# Altium PCB Power_Module.PcbDoc
Units mil, origin at the board's own origin, x right, y up, seen from the top; angles counter-clockwise.
Board outline 2558.55 x 1390.89 mil, 2 copper layers (Top Layer, Bottom Layer); 38 components, 10 nets, 91 pads, 28 vias.
Unrouted connection lines stored in the file: 32.
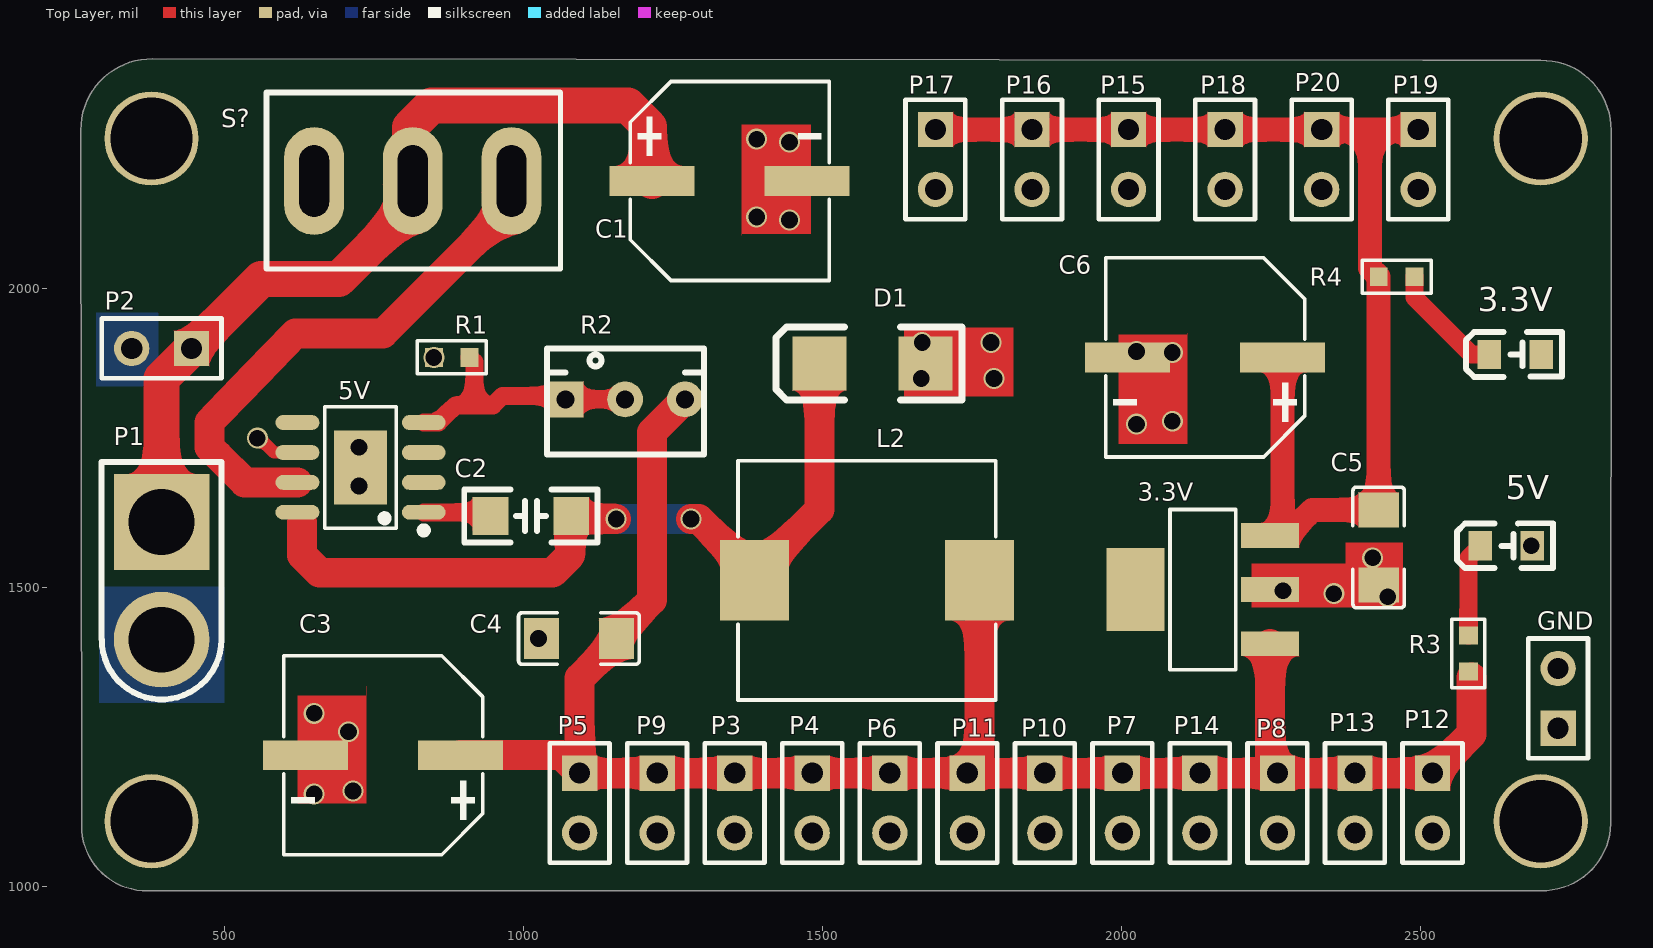
[diagram p0: Top Layer view]
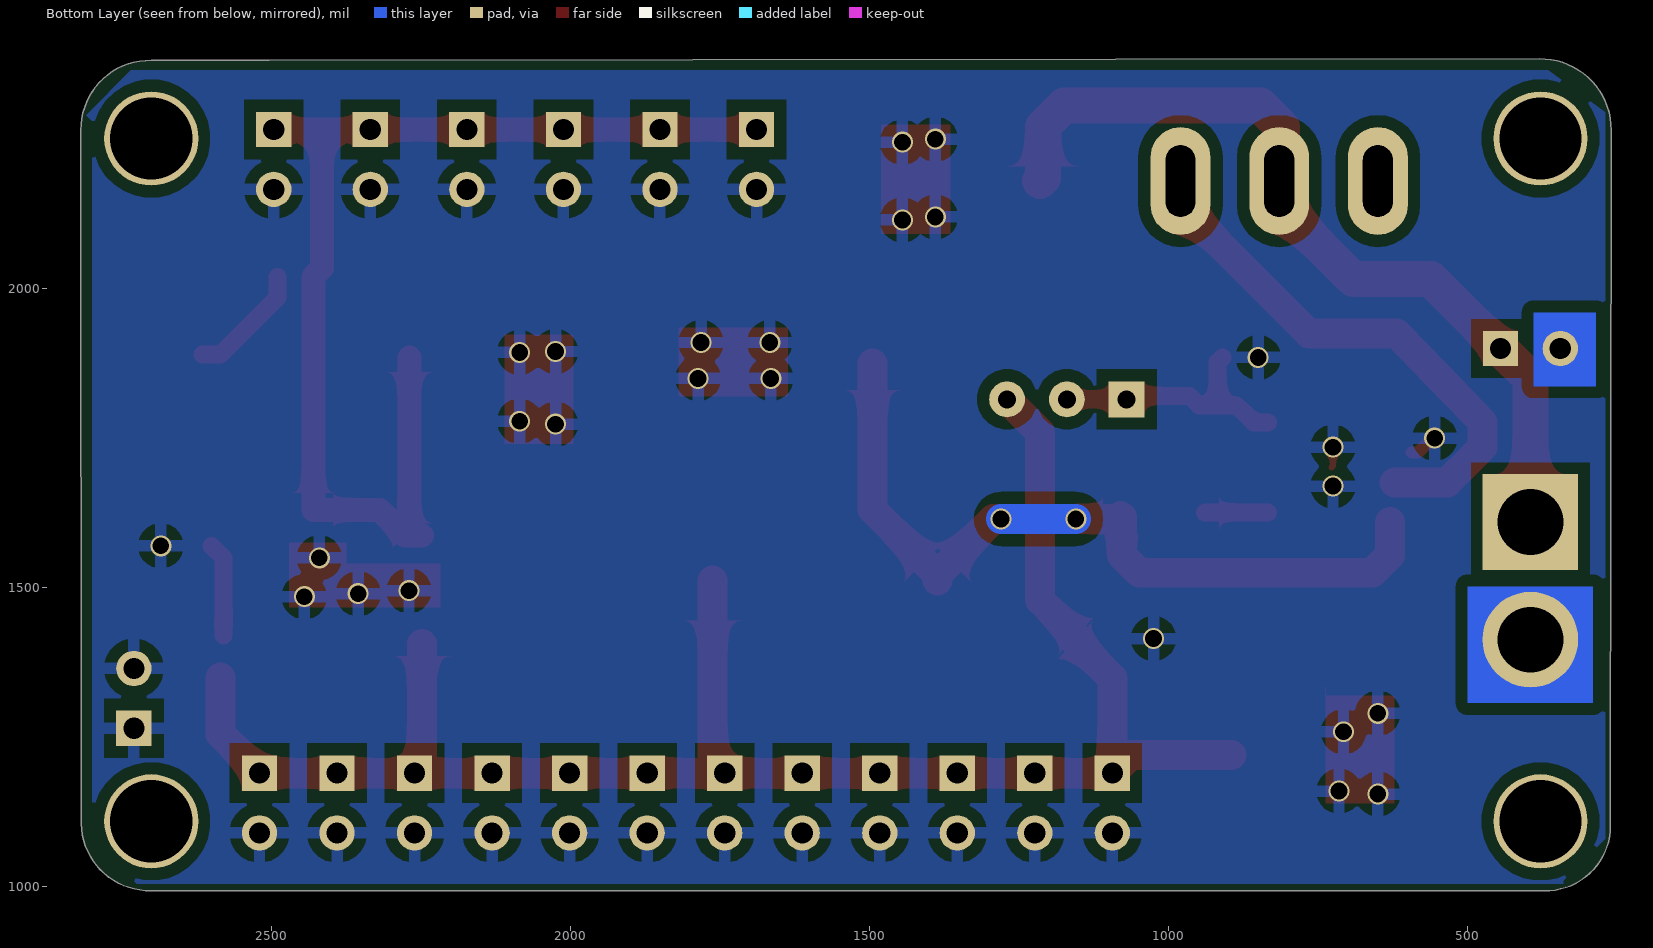
[diagram p1: Bottom Layer view, seen from below]

## Layer stack, top to bottom
Top Solder: solder mask 0.4, Solder Resist, Dk 3.5
Top Layer: signal copper 1.4
Dielectric 1: dielectric 12.6, FR-4, Dk 4.8
Bottom Layer: signal copper 1.4
Bottom Solder: solder mask 0.4, Solder Resist, Dk 3.5

## Board outline
371.69,993.3 cw(c369.8,1101.94) 261.14,1102.99 260.05,2265 cw(c378.11,2266.14) 380.16,2384.19 2504.01,2381.74 2700.86,2381.74 cw(c2702.87,2266.02) 2818.6,2264.9 2817.98,1105.28 cw(c2703.7,1107.71) 2701.27,993.43 2504.42,993.43

## Design rules (kind name [scope] priority, off if disabled: settings)
Clearance [All] p1: gap=6 ignorepadtopadclearanceinfootprint=TRUE
HoleSize [All] p1: absolutevalues=TRUE maxlimit=200 minlimit=1 maxpercent=80.000 minpercent=20.000
HoleToHoleClearance [All] p1: gap=6 allowstackedmicrovias=TRUE
PolygonConnect [All] p1: connectstyle=Relief reliefconductorwidth=20 reliefentries=4 polygonreliefangle="90 Angle" airgapwidth=20
RoutingVias [All] p1: holewidth=28 width=50 viastyle="Through Hole" minholewidth=11.81 minwidth=23.62 maxholewidth=11.81 maxwidth=23.62
SilkToSolderMaskClearance [IsPad] p1: minsilkscreentomaskgap=0 clearancetoexposedcopper=TRUE
SolderMaskExpansion [All] p1: expansion=4 istentingtop=FALSE
UnRoutedNet [All] p1 off:
Width power [InNetClass('POWER')] p1: maxlimit=60 minlimit=12 preferedwidth=20
Width [All] p2: maxlimit=100 minlimit=1 preferedwidth=10
26 further rules are at their usual default settings.

## Components (designator, comment, footprint, x,y, rotation, side; value= is the part's Value field where it differs from the comment)
3.3V "LED0" "LED 0805紫光二极管" 2655.63,1887.6 r0 top (schematic designator LED2)
3.3V "LM39100S-3.3" LM39100 2140,1485 r0 top (schematic designator U2)
5V "LED0" "LED 0805紫光二极管" 2640.63,1567.6 r0 top (schematic designator LED1)
5V "TPS5430DDA" TPS5430DDA. 720,1675 r90 top (schematic designator U1)
C1 "Cap Pol2" 电解电容470uf 1358.94,2180.61 r0 top value=220uF
C2 "102" 电容102 1017.5,1625 r0 top value=1000pF
C3 "Cap Pol2" 电解电容470uf 751.06,1219.39 r180 top value=470uF
C4 "104" 电容104 1092.7,1415 r0 top value=1000pF
C5 "104" 电容104 2430,1567.3 r90 top value=1000pF
C6 "Cap Pol2" 电解电容470uf 2125.51,1884.39 r180 top value=220uF
D1 "SS56" SMB 1583.58,1875 r180 top
GND "GND" HDR1X2 2730,1265 r90 top (schematic designator P21)
L2 "Inductor" 功率电感7*8 1570,1495 r180 top value=22mH
P1 "VCC8V" XT30. 395,1610 r270 top
P2 "VCC8V" HDR1X2 445,1900 r180 top
P3 "5V" HDR1X2 1353.22,1190 r270 top
P4 "5V" HDR1X2 1482.86,1190 r270 top
P5 "5V" HDR1X2 1093.94,1190 r270 top
P6 "5V" HDR1X2 1612.51,1190 r270 top
P7 "5V" HDR1X2 2001.43,1190 r270 top
P8 "5V" HDR1X2 2260.72,1190 r270 top
P9 "5V" HDR1X2 1223.58,1190 r270 top
P10 "5V" HDR1X2 1871.79,1190 r270 top
P11 "5V" HDR1X2 1742.15,1190 r270 top
P12 "5V" HDR1X2 2520,1190 r270 top
P13 "5V" HDR1X2 2390.36,1190 r270 top
P14 "5V" HDR1X2 2131.07,1190 r270 top
P15 "3.3V" HDR1X2 2011.83,2266.06 r270 top
P16 "3.3V" HDR1X2 1850.39,2266.06 r270 top
P17 "3.3V" HDR1X2 1688.94,2266.06 r270 top
P18 "3.3V" HDR1X2 2173.28,2266.06 r270 top
P19 "3.3V" HDR1X2 2496.18,2266.06 r270 top
P20 "3.3V" HDR1X2 2334.73,2266.06 r270 top
R1 "2K" 0603R 880.08,1885 r180 top
R2 "10kΩ" 可调电阻10k 1170,1815 r90 top
R3 "2K" 0603R 2580,1390.08 r270 top
R4 "2K" 0603R 2460.08,2020 r180 top
S? "SW-SPDT" SW-SPDT 980,2180 r180 top

## Footprints (in the part's own frame and the unit in brackets; to place one, negate y for a bottom-side part, rotate by r counter-clockwise, add the part's x,y. Pads: shape width x height; smd on the part's side, far side on the other; paste and mask are expansions set on the pad)
0603R [mm]
  rect 0.76x0.8 smd: 1(-0.76,0) 2(0.76,0)
  silkscreen extent -1.46,-0.7 1.46,0.7
HDR1X2 [mm] "Connector; Header; 2 Position"
  rect 1.5x1.5 hole 0.9: 1(0,0)
  round 1.5 hole 0.9: 2(2.54,0)
  silkscreen extent -1.27,-1.27 3.81,1.27
"LED 0805紫光二极管" [mm]
  rect 1x1.25 smd: 1(-1.032,0.061) 2(1.168,0.061)
  silkscreen extent -2.03,-0.89 2.05,1.02
LM39100 [mm]
  rect 2.465x1.05 smd: 1(2.756,-1.998) 2(2.756,0.302) 3(2.756,2.602)
  rect 2.465x3.54 smd: 4(-2.959,0.302)
  silkscreen extent -1.5,-3.1 1.3,3.7
SMB [mm]
  rect 2.3x2.3 smd: 1(-2.25,0) 2(2.25,0)
  silkscreen extent -3.8,-1.55 4.1,1.55
SW-SPDT [mil]
  oval 100x180 hole 120 slot 50 at 0 deg: 1(0,0) 2(165,0) 3(330,0)
  silkscreen extent -82,-148 410,147
TPS5430DDA. [mm]
  oval 0.63x1.865 smd: 1(-1.242,-2.878) 2(0.028,-2.878) 3(1.298,-2.878) 4(2.568,-2.878) 5(2.568,2.487) 6(1.298,2.487) 7(0.028,2.487) 8(-1.242,2.487)
  rect 3.15x2.26 smd: 9(0.663,-0.195)
  silkscreen extent -2.16,-3.03 3.24,1.33
XT30. [mil]
  rect 160x160 hole 110: 1(0,0)
  round 160 hole 110: 2(196.85,0)
  silkscreen extent -100,-100 297,100
功率电感7*8 [mm]
  rect 2.924x3.42 smd: 1(4.668,-0.436) 2(-4.888,-0.436)
  silkscreen extent -5.59,-5.51 5.37,4.64
可调电阻10k [mil]
  rect 60x60 hole 30: 1(0,100)
  round 60 hole 30: 2(0,0) 3(0,-100)
  silkscreen extent -92,-132 85,131
电容102 [mil]
  rect 60x62.99 smd: 1(-72.5,-5) 2(62.5,-5)
  silkscreen extent -116,-49 106,39, body extent -68,-37 58,27, height 48
电容104 [mm]
  rect 1.485x1.728 smd: 1(-1.593,0) 2(1.593,0)
  silkscreen extent -2.56,-1.09 2.56,1.09
电解电容470uf [mm]
  rect 3.61x1.26 smd: 1(-3.656,-0.016) 2(2.934,-0.016)
  silkscreen extent -4.59,-4.24 3.87,4.21

## Part data
3.3V 5V: "Typical INFRARED GaAs LED", LatestRevisionDate=08-Jul-2005, LatestRevisionNote="Mech Layer 1 removed.", PackageDescription="LED; 2 Leads", PackageReference=LED-0, Published=8-Jun-2000, Publisher="Altium Limited"
3.3V: BOM_JLCPCB Part Class="Extended Part", BOM_Manufacturer=HTC, BOM_Manufacturer Part=LM39100S-3.3, BOM_Supplier=LCSC, BOM_Supplier Part=C126055, Contributor=LCSC, spicePre=U, spiceSymbolName=LM39100S-3.3
5V: BOM_JLCPCB Part Class="Extended Part", BOM_Manufacturer=TI(德州仪器), BOM_Manufacturer Part=TPS5430DDA, BOM_Supplier=LCSC, BOM_Supplier Part=C502477, Contributor=lcsc, spicePre=U, spiceSymbolName=TPS5430DDA
C1 C3 C6: "Polarized Capacitor (Axial)", LatestRevisionDate=17-Jul-2002, LatestRevisionNote="Re-released for DXP Platform.", PackageDescription="Polarized Capacitor; 2 Leads", PackageReference=POLAR0.8, Published=8-Jun-2000, Publisher="Altium Limited"
C2 C4 C5: library part "Cap Semi", "Capacitor (Semiconductor SIM Model)", LatestRevisionDate=29-May-2009, LatestRevisionNote="IPC-7351 Footprint Added.", PackageDescription="Chip Capacitor", PackageReference=C1206, Published=8-Jun-2000, Publisher="Altium Limited"
D1: library part Diode, "Default Diode", Code_JEDEC=DO-214-AB, LatestRevisionDate=17-Jul-2002, LatestRevisionNote="Re-released for DXP Platform.", PackageDescription="DO-214-AB/SMC; 2 C-Bend Leads; Body 7.9 x 5.9 mm, inc. leads (LxW)", PackageReference=SMC, PackageVersion=Sep-1996, Published=8-Jun-2000, Publisher="Altium Limited"
GND P1 P2 P3 P4 P5 P6 P7 P8 P9 P10 P11 P12 P13 P14 P15 P16 P17 P18 P19 P20: library part "Header 2", "Header, 2-Pin", LatestRevisionDate=17-Jul-2002, LatestRevisionNote="Re-released for DXP Platform.", Publisher="Altium Limited"
R1 R3 R4: library part Res2, "Resistor", LatestRevisionDate=17-Jul-2002, LatestRevisionNote="Re-released for DXP Platform.", PackageDescription="Axial Device, Thru-Hole; 2 Leads; 0.4 in Pin Spacing", PackageReference=AXIAL-0.4, Published=8-Jun-2000, Publisher="Altium Limited"
R2: BOM_JLCPCB Part Class="Extended Part", BOM_Manufacturer=BOURNS, BOM_Manufacturer Part=3266Y-1-103LF, BOM_Supplier=LCSC, BOM_Supplier Part=C719182, Contributor=LCSC, nameAlias=Resistance, spicePre=R, spiceSymbolName=3266Y-1-103LF
S?: "SPDT Subminiature Toggle Switch, Right Angle Mounting, Vertical Actuation", ComponentLink1Description="Manufacturer Link", ComponentLink1URL=http://www.apem.com, DatasheetVersion=05-Dec-2000, LatestRevisionDate=17-Dec-2003, LatestRevisionNote="Schematic revised, PCB Footprint replaced.", PackageDescription="Switch; 4 Leads", PackageReference=TL36WW15050, Published=24-Mar-1999, Publisher="Altium Limited"
L2: Code_IEC=1005, Code_JEITA=0402, LatestRevisionDate=29-May-2009, LatestRevisionNote="IPC-7351 Footprint Added.", PackageDescription="Chip Inductor", PackageReference=0402-A, Published=8-Jun-2000, Publisher="Altium Limited"

## Free pads (board coordinates)
  round 157.48 hole 137.8 unplated: 14(378.11,1109.41) 14(378.11,2251.14) 14(2700.94,1109.41) 14(2700.94,2251.14)

## Via types
v1: diameter 35, hole 28, Top Layer to Bottom Layer, 28 vias

## Nets (pads, with @x,y where several pads share a name; then routed paths per layer and width w, separated by ;. In a path a pad name is that pad's centre, name@x,y a point inside that pad or via, vN(x,y) a via of type N, cw(c..) or ccw(c..) an arc to the next point about the centre after c; other vN are vias at no path point)
GND: 3.3V.2 5V.2@2686.61,1570 5V.6 5V.9 C1.2 C3.2 C4.1 C5.1 C6.2 D1.1 GND.1 GND.2 P1.2 P2.2 P3.2 P4.2 P5.2 P6.2 P7.2 P8.2 P9.2 P10.2 P11.2 P12.2 P13.2 P14.2 P15.2 P16.2 P17.2 P18.2 P19.2 P20.2 R1.2 | length 246.9
  Top Layer w10: C3.2 647.09,1220 C3.2@666.89,1200.2 ; v1(725,1735) 725,1703.8 5V.9 ; v1(1445,2115) 1445,2160.2 1450,2160.2 C1.2@1469.8,2180 ; v1(2420,1550) 2420,1514.61 C5.1
  Top Layer w20: v1@559.06,1750 582.94,1726.12 5V.6@593.75,1726.12
  other v1: 650,1155 715,1160 707.5,1259.12 650,1290 1025,1415 2445,1485 2355,1490 2270,1495 2685,1570 725,1670 555,1750 2025,1773.38 2085,1778.38 1665,1850 1786.62,1850 850.16,1885 2085,1893.38 2025,1895 1666.62,1910 1781.62,1910 1390,2120 1445,2245 1390,2250
NetC2_1: 5V.1@833.29,1626.12 C2.1 | length 114.2
  Top Layer w10: C2.1@938.88,1626.12 C2.1
  Top Layer w30: 5V.1@833.29,1626.12 C2.1@938.88,1626.12
NetC2_2: 5V.8 C2.2 D1.2 L2.1 | length 1349.4
  Top Layer w50: 630,1610 630,1554.29 659.29,1525 1048.86,1525 1078.15,1554.29 1078.15,1618.15 C2.2 1085,1615 v1(1155,1615) ; v1(1280,1615) 1293.14,1615 L2.1@1386.22,1521.91 ; L2.1 L2.1@1386.22,1521.91 ; D1.2 1495,1630.69 L2.1@1386.22,1521.91
  Bottom Layer w50: v1(1155,1615) v1(1280,1615)
NetLED1_1: 5V.1@2600,1570 R3.1 | length 158.3
  Top Layer w30: R3.1 2580,1550 5V.1@2600,1570
NetLED2_1: 3.3V.1@2615,1890 R4.1 | length 199.4
  Top Layer w30: R4.1 2490,1985 2585,1890 3.3V.1@2615,1890
NetR1_1: 5V.4 R1.1 R2.1 R2.2 | length 440.9
  Top Layer w30: 5V.4 857.6,1776.12 886.48,1805 917.81,1805 ; R1.1 917.81,1877.19 917.81,1805 ; R2.2 R2.1 1064.14,1820.86 965,1820.86 949.14,1805 917.81,1805
NetS?_1: 5V.7 S?.1 | length 909.9
  Top Layer w50: 5V.7 533.88,1676.12 489.18,1720.82 475.1,1734.9 475.1,1776.32 488.62,1790.95 552.89,1857.33 618.42,1925 765,1925 980,2140 S?.1
VCC3.3V: 3.3V.3 C5.2 C6.1 P15.1 P16.1 P17.1 P18.1 P19.1 P20.1 R4.2 | length 1946.4
  Top Layer w40: P17.1 P16.1 P15.1 P18.1 P20.1 2415.46,2266.06 ; 3.3V.3 3.3V.3@2268.78,1587.46 ; C6.1 2269.45,1588.13 3.3V.3@2268.78,1587.46 ; P19.1 2415.46,2266.06 ; 3.3V.3@2268.78,1587.46 2276.38,1587.46 2318.92,1630 C5.2 2430,2019.84 R4.2 2415.46,2034.7 2415.46,2266.06
VCC5V: 3.3V.1@2248.52,1406.36 C3.1 C4.2 L2.2 P3.1 P4.1 P5.1 P6.1 P7.1 P8.1 P9.1 P10.1 P11.1 P12.1 P13.1 P14.1 R2.3 R3.2 | length 3074.2
  Top Layer w50: C3.1 1063.94,1220 P5.1 ; R2.3 1215,1760 1215,1479.39 1159.63,1424.02 1159.63,1419.23 C4.2 1155.39,1410.22 1093.94,1348.76 P5.1 ; L2.2 1762.44,1210.29 P11.1 ; 3.3V.1@2248.52,1406.36 2248.52,1202.19 P8.1 ; R3.2@2585,1350 2585,1255 P12.1 P13.1 P8.1 ; P5.1 P9.1 P3.1 P4.1 P6.1 P11.1 ; P11.1 P10.1 P7.1 P14.1 P8.1
VCC8V: C1.1 P1.1 P2.1 S?.2 | length 1434.5
  Top Layer w60: P1.1 395,1850 P2.1 561.17,2016.17 691.17,2016.17 815,2140 S?.2 810,2185 810,2269.85 846.15,2306 1174.85,2306 1210,2270.85 1210,2185 C1.1
pads on no net: 3.3V.4 5V.2@833.29,1676.12 5V.3 5V.5 S?.3

## Polygon pours and split planes (outlines as drawn)
GND on Bottom Layer "NONET_L-01_P-001" (solid, pour order 0): 365,2365 2735,2365 2810,2290 2800,2280 2800,1080 2725,1005 340,1005 340,1010 270,1080 270,2295

## Other copper
Top Layer:
  region net GND: 2375,1575 2470,1575 2470,1570 2470,1565 2470,1540 2375,1540
  region net GND: 737.5,1335 737.5,1140 622.5,1140 622.5,1319.12 737.5,1319.12
  region net GND: 2110,1925.88 2110,1740.88 1995,1740.88 1995,1923.38 2110,1923.38
  region net GND: 2375,1467.5 2217.5,1467.5 2217.5,1540 2470,1540 2470,1467.5
  region net GND: 1634.12,1935 1819.12,1935 1819.12,1820 1636.62,1820 1636.62,1935
  region net GND: 1365,2089.12 1365,2274.12 1480,2274.12 1480,2091.62 1365,2091.62
Bottom Layer:
  rectangle net GND: 285,1836.85 390,1960
  rectangle net GND: 290,1306.85 500,1501.85

## Silkscreen, mask and mechanical layers (free items; w line width, h text height)
Mechanical 1:
  the board outline again, w10